# Altium PCB Featured_Tag_RBS020902T.PcbDoc
Units mm, origin at the board's own origin, x right, y up, seen from the top; angles counter-clockwise.
Board outline 33.22 x 33.22 mm, 2 copper layers (Top Layer, Bottom Layer); 37 components, 34 nets, 164 pads, 29 vias.
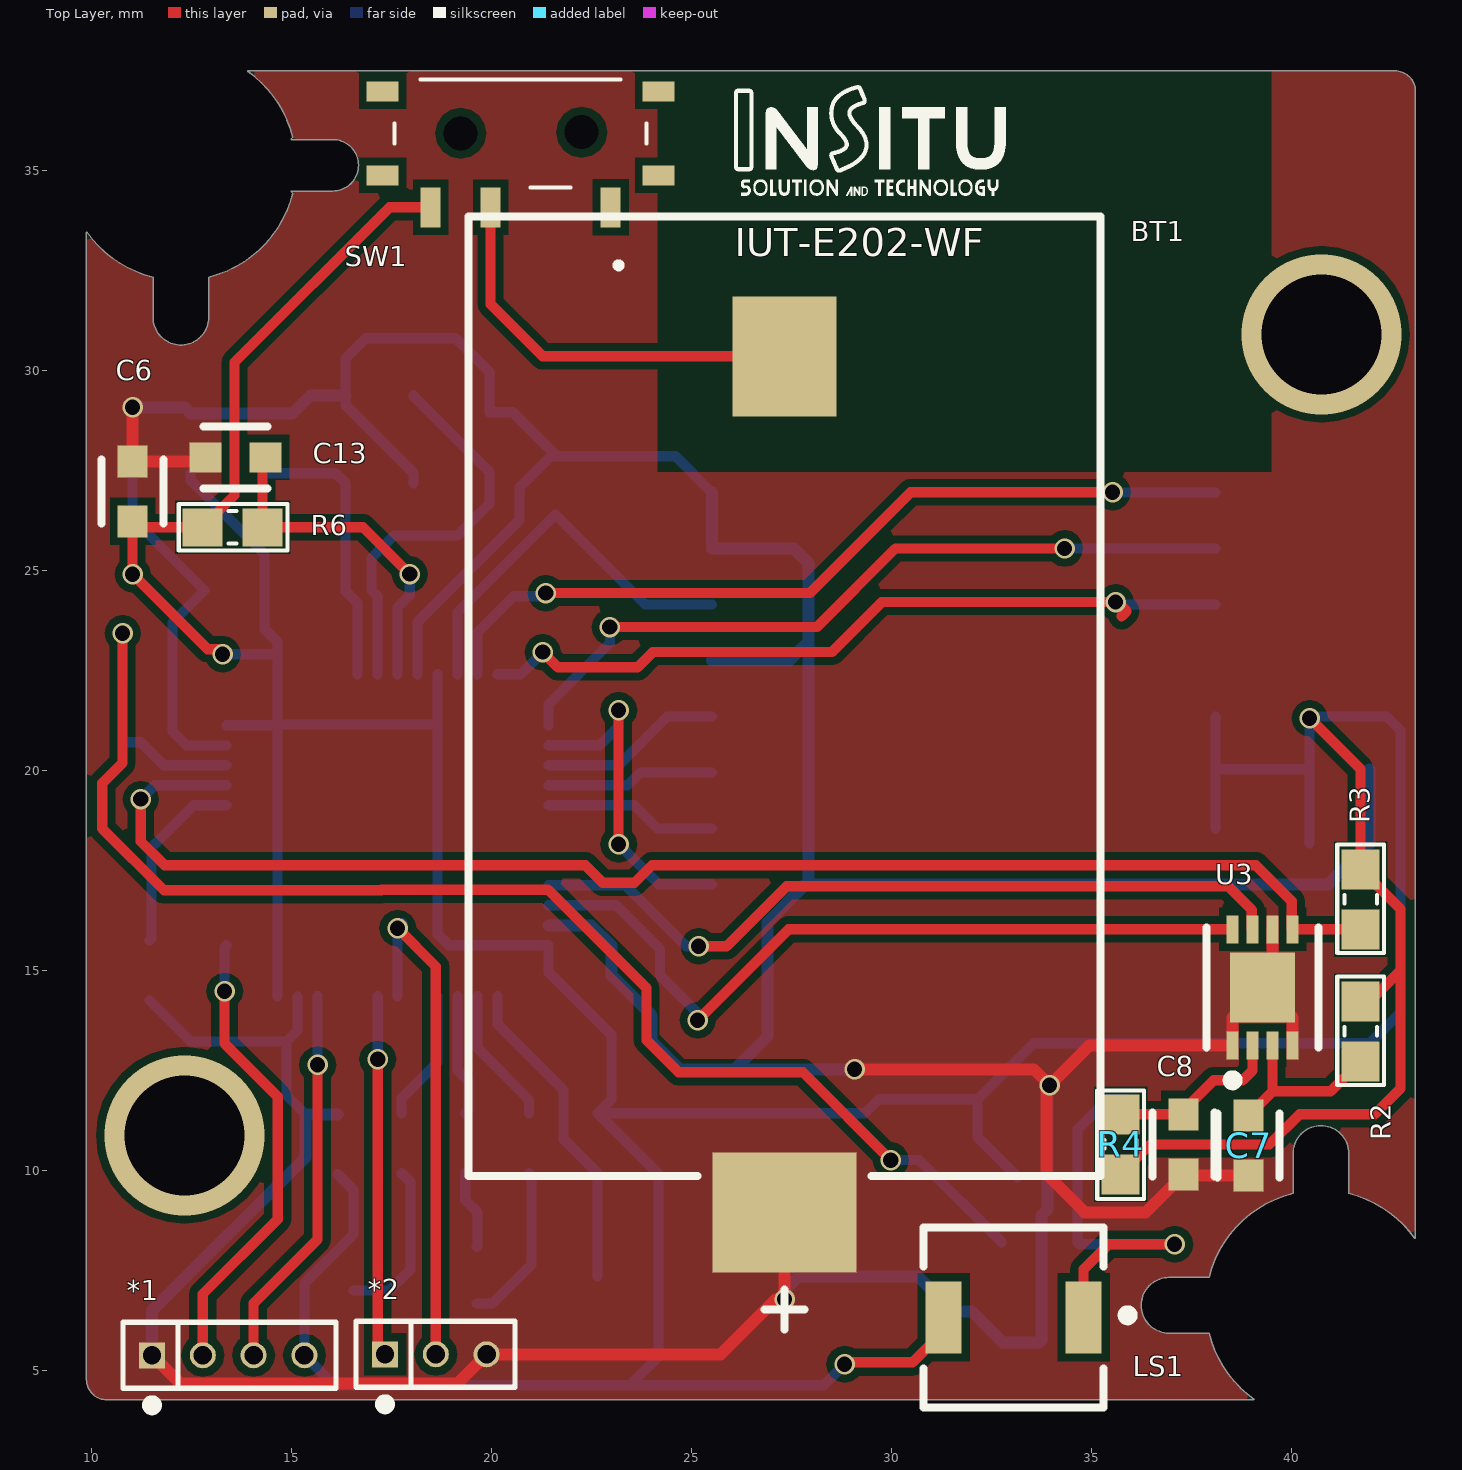
[diagram p0: Top Layer view]
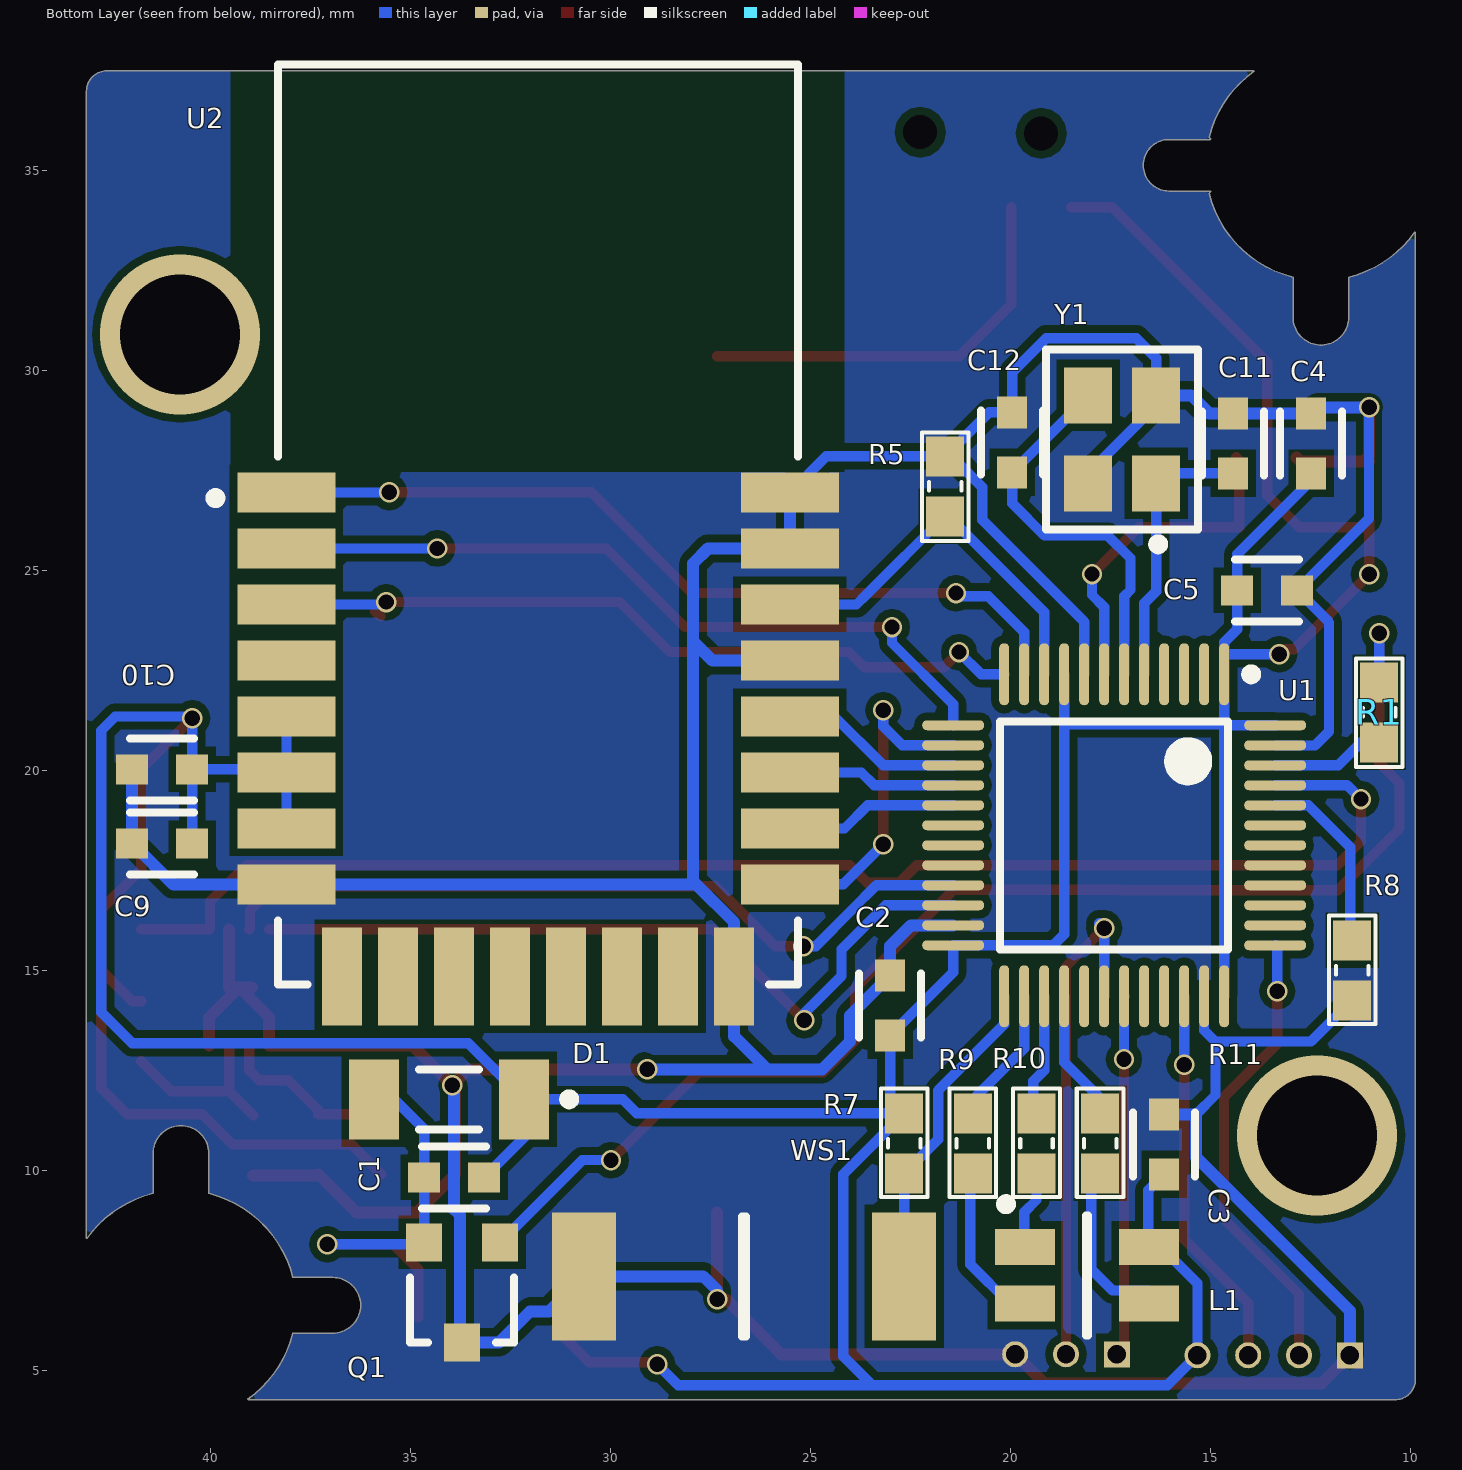
[diagram p1: Bottom Layer view, seen from below]
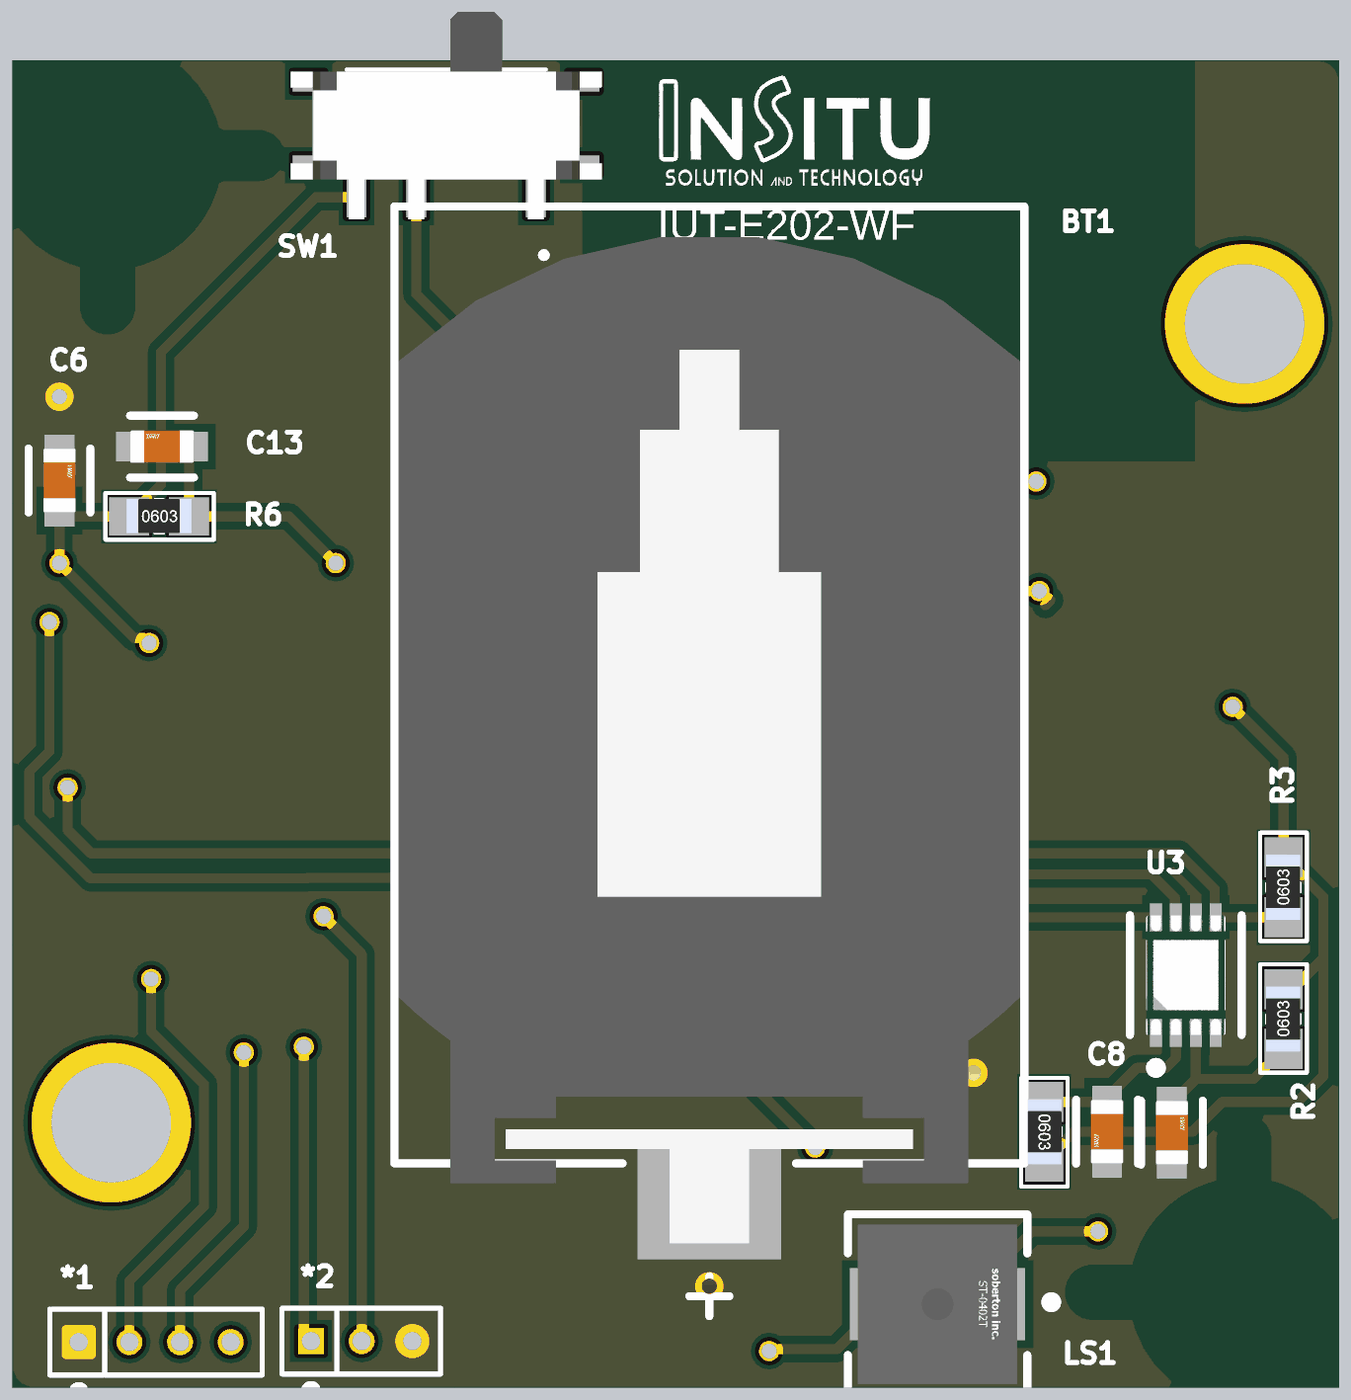
[diagram p2: 3D render of the assembled board from above, using the file's embedded part models]
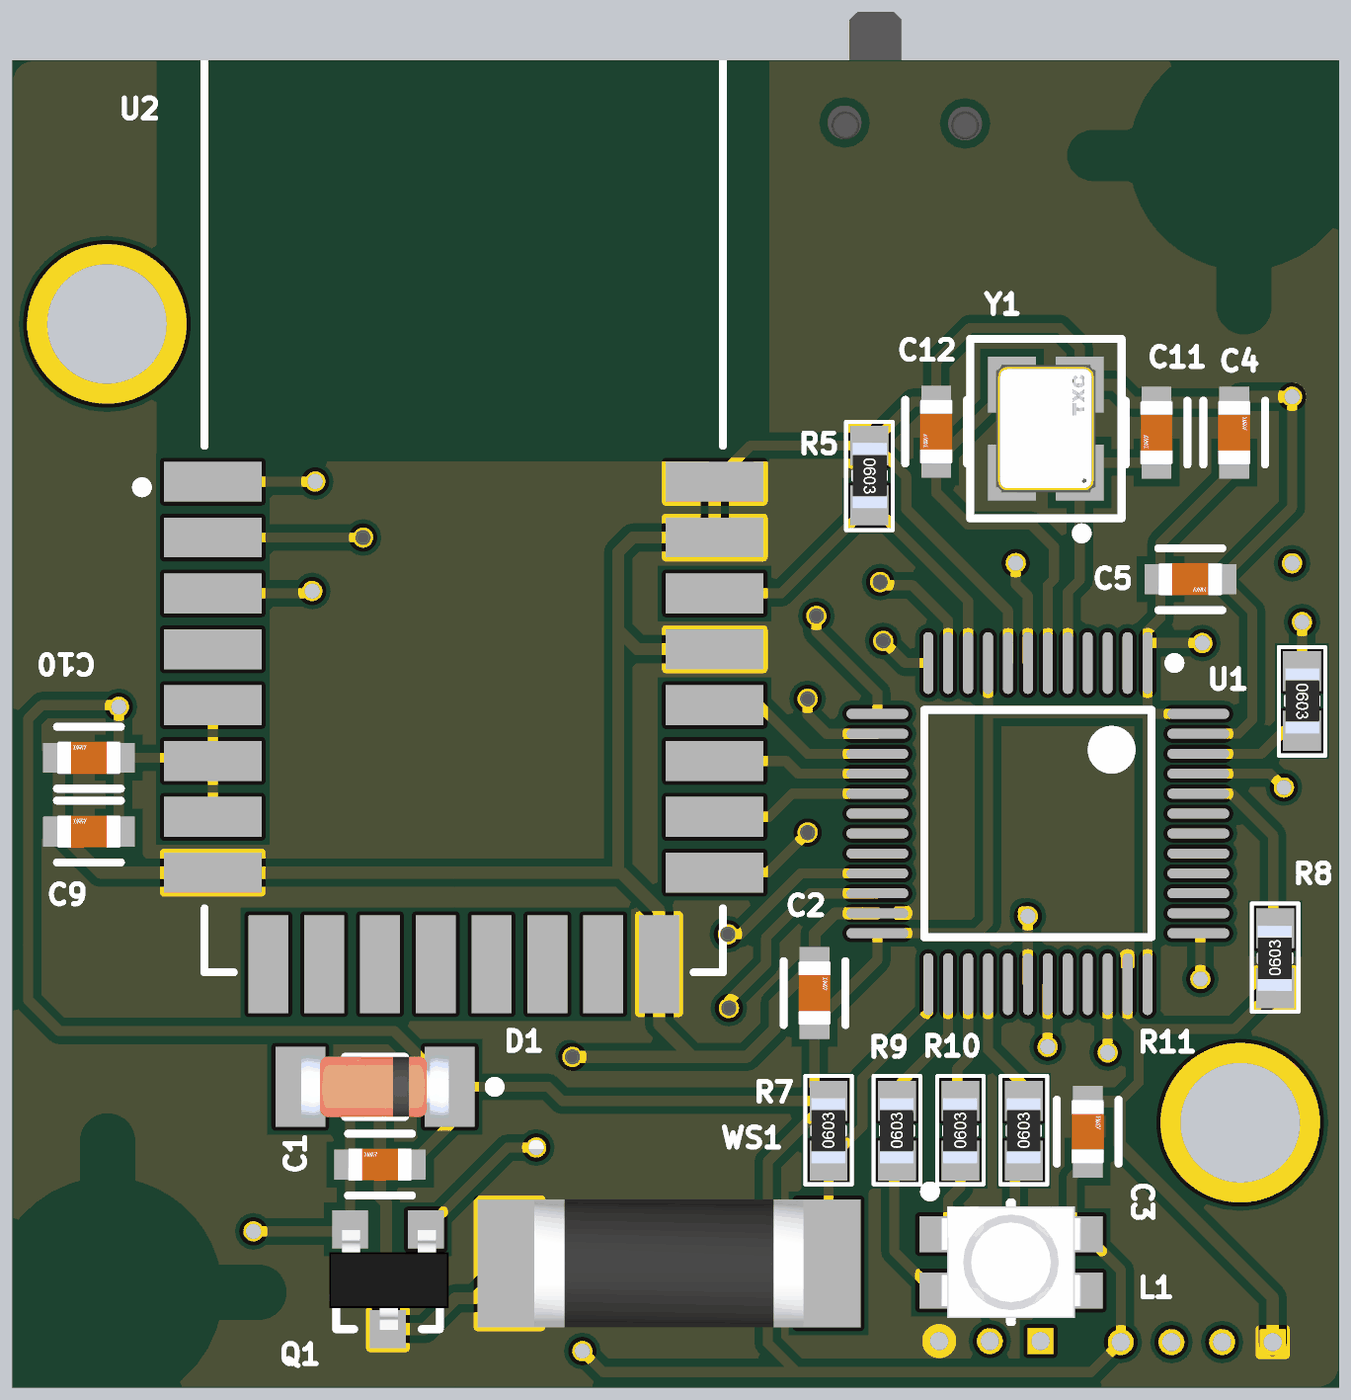
[diagram p3: 3D render of the assembled board from below, using the file's embedded part models]

## Layer stack, top to bottom
Top Solder: solder mask 0.0102, Solder Resist, Dk 3.5
Top Layer: signal copper 0.0356
Dielectric 1: dielectric 0.32, FR-4, Dk 4.8
Bottom Layer: signal copper 0.0356
Bottom Solder: solder mask 0.0102, Solder Resist, Dk 3.5

## Board outline
9.871,4.769 ccw(c10.377,4.769) 10.377,4.263 10.378,4.263 39.055,4.263 39.06,4.275 cw(c40.732,6.624) 37.936,5.923 37.929,5.928 36.935,5.928 36.934,5.928 cw(c36.935,6.624) 36.935,7.319 37.929,7.319 37.936,7.325 cw(c40.732,6.624) 40.031,9.42 40.037,9.427 40.037,10.421 40.037,10.422 cw(c40.732,10.421) 41.428,10.421 41.428,9.427 41.433,9.42 cw(c40.732,6.624) 43.081,8.296 43.093,8.299 43.093,36.978 43.093,36.979 ccw(c42.587,36.979) 42.587,37.485 13.908,37.485 13.904,37.472 cw(c12.232,35.124) 15.028,35.828 cw(c7.741,41.518) 14.989,35.778 14.994,35.767 16.03,35.767 cw(c16.03,35.124) 16.673,35.124 cw(c16.03,35.124) 16.03,34.48 14.994,34.48 14.989,34.47 cw(c7.719,28.712) 15.028,34.42 cw(c12.232,35.124) 12.933,32.327 12.928,32.321 12.928,31.326 cw(c12.232,31.326) 11.537,31.326 11.537,32.321 11.531,32.327 cw(c12.232,35.124) 9.884,33.452 9.871,33.448

## Design rules (kind name [scope] priority, off if disabled: settings)
Clearance [All] p1: gap=0.2 ignorepadtopadclearanceinfootprint=FALSE
HoleSize [All] p1: absolutevalues=TRUE maxlimit=6 minlimit=0.102 maxpercent=80.000 minpercent=20.000
HoleToHoleClearance [Istext] p1: gap=0.254 allowstackedmicrovias=TRUE
MinimumSolderMaskSliver [TextHeight] p1: minsoldermaskwidth=0.254
PolygonConnect [All] p1: connectstyle=Direct reliefconductorwidth=0.254 reliefentries=4 polygonreliefangle="90 Angle" airgapwidth=0.254
RoutingVias [All] p1: holewidth=0.46 width=0.46 viastyle="Through Hole" minholewidth=0.46 minwidth=0.46 maxholewidth=0.46 maxwidth=0.46
SilkToSilkClearance [TextHeight] p1: silktosilkclearance=0.254
SilkToSolderMaskClearance [IsText] p1: minsilkscreentomaskgap=0.15 clearancetoexposedcopper=TRUE
SolderMaskExpansion [All] p1: expansion=0.102 istentingtop=FALSE
Width [All] p1: maxlimit=0.9 minlimit=0.2 preferedwidth=0.6
25 further rules are at their usual default settings.

## Components (designator, comment, footprint, x,y, rotation, side; value= is the part's Value field where it differs from the comment)
*1 "JP 1x7 1.27mm" "JP 1x4 1.27mm" 11.485,5.375 r0 top
*2 "JP 1x3 1.27mm" "JP 1x3 1.27mm" 17.335,5.4 r0 top
BT1 "CR2032" FP-S8421-45R-MFG 27.325,21.85 r0 top
C1 "100pF" FP-0603-L_1_6_0_15-W_0_81-MFG 33.9,9.825 r0 bottom
C2 "100nF" FP-0603-L_1_6_0_15-W_0_81-MFG 23,14.125 r90 bottom
C3 "100nF" FP-0603-L_1_6_0_15-W_0_81-MFG 16.15,10.65 r90 bottom
C4 "100nF" FP-0603-L_1_6_0_15-W_0_81-MFG 12.475,28.175 r90 bottom
C5 "100nF" FP-0603-L_1_6_0_15-W_0_81-MFG 13.575,24.5 r180 bottom
C6 "4.7uF" FP-0603-L_1_6_0_15-W_0_81-MFG 11.025,26.975 r90 top
C7 "1uF" FP-0603-L_1_6_0_15-W_0_81-MFG 38.925,10.625 r90 top
C8 "10nF" FP-0603-L_1_6_0_15-W_0_81-MFG 37.3,10.65 r270 top
C9 "10uF" FP-0603-L_1_6_0_15-W_0_81-MFG 41.2,18.175 r0 bottom
C10 "100nF" FP-0603-L_1_6_0_15-W_0_81-MFG 41.2,20.025 r0 bottom
C11 "12pF" FP-0603-L_1_6_0_15-W_0_81-MFG 14.425,28.175 r270 bottom
C12 "12pF" FP-0603-L_1_6_0_15-W_0_81-MFG 19.95,28.2 r270 bottom
C13 "100nF" FP-0603-L_1_6_0_15-W_0_81-MFG 13.597,27.825 r180 top
D1 "LL4148" SOD-80 34.025,11.775 r0 bottom
L1 "LED 3528" "LED RGB 3528" 18.075,7.375 r180 bottom
LS1 "ST-0402-BUZZER" FP-ST-0402T-MFG 33.05,6.325 r180 top value=17Ω
Q1 "HF" SOT23 33.7,6.95 r0 bottom value=C9014
R1 "4.7" "tro smd 0603" 10.775,21.45 r270 bottom
R2 "1k" "tro smd 0603" 41.725,13.475 r90 top
R3 "4.7K" "tro smd 0603" 41.725,16.775 r90 top
R4 "1k" "tro smd 0603" 35.725,10.65 r270 top
R5 "10k" "tro smd 0603" 21.625,27.1 r270 bottom
R6 "10k" "tro smd 0603" 13.525,26.075 r0 top
R7 "10k" "tro smd 0603" 22.65,10.675 r90 bottom
R8 "10k" "tro smd 0603" 11.45,15 r90 bottom
R9 "1K" "tro smd 0603" 20.934,10.675 r90 bottom
R10 "1K" "tro smd 0603" 19.343,10.675 r90 bottom
R11 "1K" "tro smd 0603" 17.751,10.675 r90 bottom
SW1 "MSK-12C02" sw_msk_12c02 25.627,38.262 r180 top
U1 "STM32F103C8T6" STM-LQFP48_L 17.4,18.375 r270 bottom
U2 "DWM1000" DECW-DWM1000-24_V 31.8,26.145 r180 bottom
U3 "MAX17043G+T" FP-T823-1-MFG 39.275,14.575 r90 top
WS1 "RBS020902T" RBS020902T 26.65,7.35 r0 bottom
Y1 "8MHz" FP-7M-MFG 17.2,28.275 r90 bottom

## Footprints (in the part's own frame and the unit in brackets; to place one, negate y for a bottom-side part, rotate by r counter-clockwise, add the part's x,y. Pads: shape width x height; smd on the part's side, far side on the other; paste and mask are expansions set on the pad)
DECW-DWM1000-24_V [mm] "SMD, 24-Leads, Body 23x13mm, Pitch 1.4mm"
  rect 2.45x1 smd: 1(-6.295,0.8) 2(-6.295,-0.6) 3(-6.295,-2) 4(-6.295,-3.4) 5(-6.295,-4.8) 6(-6.295,-6.2) 7(-6.295,-7.6) 8(-6.295,-9) 17(6.295,-9) 18(6.295,-7.6) 19(6.295,-6.2) 20(6.295,-4.8) 21(6.295,-3.4) 22(6.295,-2) 23(6.295,-0.6) 24(6.295,0.8)
  rect 1x2.45 smd: 9(-4.9,-11.295) 10(-3.5,-11.295) 11(-2.1,-11.295) 12(-0.7,-11.295) 13(0.7,-11.295) 14(2.1,-11.295) 15(3.5,-11.295) 16(4.9,-11.295)
  silkscreen extent -8.2,-11.5 6.5,11.5, body extent -6.5,-11.5 6.5,11.5, height 4
FP-7M-MFG [mm]
  rect 1.4x1.2 smd paste+0 mask+0: 1(-1.1,-0.85) 2(1.1,-0.85) 3(1.1,0.85) 4(-1.1,0.85)
  silkscreen extent -2.75,-1.9 2.25,1.9, body extent -1.6,-1.25 1.6,1.25, height 0.8
FP-0603-L_1_6_0_15-W_0_81-MFG [mm]
  rect 0.8x0.75 smd paste+0 mask+0: 1(-0.75,0) 2(0.75,0)
  silkscreen extent -0.8,-0.77 0.8,0.77, body extent -0.8,-0.4 0.8,0.41, height 0.9
FP-S8421-45R-MFG [mm]
  rect 2.6x3 smd paste+0 mask+0: 1(0,8.5)
  rect 3.6x3 smd paste+0 mask+0: 2(0,-12.9)
  silkscreen extent -7.9,-15.83 7.9,12, body extent -8,-14.5 8,12.09, height 0.25
FP-ST-0402T-MFG [mm]
  rect 0.9x1.8 smd paste+0 mask+0: 1(-1.75,0) 2(1.75,0)
  silkscreen extent -2.98,-2.25 2.25,2.25, body extent -2.35,-2.35 2.35,2.35, height 0.25
FP-T823-1-MFG [mm]
  rect 0.7x0.3 smd paste+0 mask+0: 1(-1.45,0.75) 2(-1.45,0.25) 3(-1.45,-0.25) 4(-1.45,-0.75) 5(1.45,-0.75) 6(1.45,-0.25) 7(1.45,0.25) 8(1.45,0.75)
  rect 1.75x1.63 smd paste+0 mask+0: 9(0,0)
  silkscreen extent -2.45,-1.4 1.5,1.4, body extent -1.9,-1.12 1.9,1.12, height 0.25
"JP 1x3 1.27mm" [mm]
  rect 0.65x0.65 hole 0.46: 1(0,0)
  round 0.65 hole 0.46: 2(1.27,0) 3(2.54,0)
  silkscreen extent -0.73,-1.37 3.25,0.82
"JP 1x4 1.27mm" [mm]
  rect 0.65x0.65 hole 0.46: 1(0.025,0)
  round 0.65 hole 0.46: 2(1.295,0) 2(3.835,0) 3(2.565,0)
  silkscreen extent -0.7,-1.37 4.62,0.82
"LED RGB 3528" [mm] "Chip LED, 4-Leads, Body 2.8x3.5mm (max), Pitch 1.42mm, IPC Medium Density"
  rect 1.5x0.9 smd: 1(1.55,0.707) 2(1.55,-0.71) 3(-1.55,0.707) 4(-1.55,-0.707)
  silkscreen extent -2.16,-1.5 0.03,1.9, body extent -1.75,-1.4 1.75,1.4, height 1.87
RBS020902T [mm] "SENSOR SWITCH, 2-Leads, Body 6.75x3.20mm, IPC Medium Density"
  rect 1.6x3.2 smd: 1(-4,0) 2(4,0)
  silkscreen extent -0.05,-1.5 0.05,1.5, body extent -3.37,-1.6 3.38,1.6, height 3.2
SOD-80 [mm]
  rect 1.25x2 smd: 1(-1.875,0) 2(1.875,0)
  silkscreen extent -3.12,-0.75 0.75,0.75, body extent -1.85,-0.78 1.85,0.78, height 1.6
SOT23 [mm] "SOT23"
  rect 0.9x0.95 smd: 1(-0.95,-1.25) 2(0,1.25)
  rect 0.9x0.95 smd mask+0: 3(0.95,-1.25)
  silkscreen extent -1.3,-0.38 1.3,1.25, body extent -1.52,-1.23 1.48,1.27, height 1.06
STM-LQFP48_L [mm] "QFP, 48-Leads, Body 7x7mm, Pitch 0.5mm, IPC High Density"
  oval 1.55x0.25 smd: 1(-4.025,2.75) 2(-4.025,2.25) 3(-4.025,1.75) 4(-4.025,1.25) 5(-4.025,0.75) 6(-4.025,0.25) 7(-4.025,-0.25) 8(-4.025,-0.75) 9(-4.025,-1.25) 10(-4.025,-1.75) 11(-4.025,-2.25) 12(-4.025,-2.75) 25(4.025,-2.75) 26(4.025,-2.25) 27(4.025,-1.75) 28(4.025,-1.25) 29(4.025,-0.75) 30(4.025,-0.25) 31(4.025,0.25) 32(4.025,0.75) 33(4.025,1.25) 34(4.025,1.75) 35(4.025,2.25) 36(4.025,2.75)
  oval 0.25x1.55 smd: 13(-2.75,-4.025) 14(-2.25,-4.025) 15(-1.75,-4.025) 16(-1.25,-4.025) 17(-0.75,-4.025) 18(-0.25,-4.025) 19(0.25,-4.025) 20(0.75,-4.025) 21(1.25,-4.025) 22(1.75,-4.025) 23(2.25,-4.025) 24(2.75,-4.025) 37(2.75,4.025) 38(2.25,4.025) 39(1.75,4.025) 40(1.25,4.025) 41(0.75,4.025) 42(0.25,4.025) 43(-0.25,4.025) 44(-0.75,4.025) 45(-1.25,4.025) 46(-1.75,4.025) 47(-2.25,4.025) 48(-2.75,4.025)
  silkscreen extent -4.15,-2.85 2.85,3.55, body extent -3.5,-3.5 3.5,3.5, height 1.6
sw_msk_12c02 [mm]
  rect 0.5x1 smd: A1(2.652,4.187) B1(5.652,4.187) C1(7.152,4.187)
  round 0.425 hole 0.85 unplated: MH1(3.378,2.311) MH2(6.402,2.337)
  rect 0.8x0.5 smd: MP1(8.352,3.387) MP2(8.352,1.287) MP3(1.452,1.287) MP4(1.452,3.387)
  silkscreen extent 1.75,0.99 8.05,5.69, body extent 1,-0.46 8.8,4.74, height 1.46
"tro smd 0603" [mm] "Chip Capacitor, 2-Leads, Body 1,60x0,80mm, IPC Medium Density"
  rect 1x0.95 smd mask+0.076: 1(-0.75,0) 2(0.75,0)
  silkscreen extent -1.35,-0.58 1.37,0.58, body extent -0.82,-0.42 0.82,0.43, height 0.44

## Part data
BT1: library part CR2450NFH-LF, "Battery", Manufacturer_Name=RENATA, Mouser Part Number=614-CR2450NFH-LF, Datasheet Link=https://www.renata.com/fileadmin/downloads/productsheets/lithium/tabbed_lithium/tab_2pins_horizontal/CR2450NFH-LF.pdf, Height=5mm, Manufacturer_Part_Number=CR2450NFH-LF, Mouser Price/Stock=https://www.mouser.co.uk/ProductDetail/Renata/CR2450NFH-LF/?qs=xQKTP3rDTQhL%252B2W8VgWSZA%3D%3D
C1 C2 C3 C4 C5 C6 C7 C8 C9 C10 C11 C12 C13: library part CMP-2006-04515-2, "General Purpose Ceramic Capacitor, 0603, 33nF, 5%, X7R, 15%, 16V", Capacitance=33nF, Case/Package=0603, Case Code (Metric)=1608, Dielectric=X7R, Max Operating Temperature=125°C, Min Operating Temperature=-55°C, Package Quantity=4000, Tolerance=5%, Voltage Rating=16V, Case Code (Imperial)=0603, Construction=Flat, Depth=0.81mm, Dissipation Factor=3.5%, Length=1.6mm, Mount="Surface Mount", Number of Pins=2, Packaging="Tape and Reel", Radiation Hardening=No, RoHS Compliant=Yes, Series=-, Termination=SMD/SMT, Thickness=0.035inch, Voltage Rating (DC)=16V, Width=0.032inch
D1: library part LL4148-GS18, "Vishay LL4148-GS18 Switching Diode, 300mA, 2-Pin MiniMELF", Manufacturer_Name=Vishay, Mouser Part Number=78-LL4148-GS18, Arrow Part Number=LL4148-GS18, Arrow Price/Stock=https://www.arrow.com/en/products/ll4148-gs18/vishay?region=nac, Datasheet Link=https://www.vishay.com/docs/85557/ll4148.pdf, Manufacturer_Part_Number=LL4148-GS18, Mouser Price/Stock=https://www.mouser.co.uk/ProductDetail/Vishay-Semiconductors/LL4148-GS18?qs=YkIJFe%252BtFEUsKqcD4T1jvg%3D%3D
L1: library part "LED 3528 RGB", "Dán", Chung_Loai=Dán, Don_Vi=Con, Ma_Hang=MH007160, Ten_Linh_Kien="LED3528 RGB"
LS1: library part CMP-247804-000001-1, "AUDIO MAGNETIC XDCR 2-4V SMD", Current=90mA, Frequency=4kHz, Manufacturer="Soberton Inc.", Manufacturer Part Number=ST-0402T, Max Supply Voltage=4V, Min Supply Voltage=2V, Operating Supply Voltage=3V, Resistance=17Ω, Temperature="-30°C to +70°C", Temperature Range High=+70°C, Temperature Range Low=-30°C, Automotive=No, Category=Speak, ComponentLink2Description=Datasheet, ComponentLink2URL=https://www.soberton.com/wp-content/uploads/2019/02/ST-0402T-19-Feb-2019.pdf, Device Class L1=Electromechanical, Device Class L2="Audio Products", Device Class L3=Buzzers, Digikey Description="AUDIO MAGNETIC XDCR 2-4V SMD", Height=2.5mm, Lead Free=Yes, Octopart=https://octopart.com/st-0402t-soberton-60771822, Package=ST-0402T, RoHS=TRUE
Q1: library part "C1815 HF SMD", "NPN transistor"
R1 R2 R3 R4: library part "Tro 0603 5% 1k", "Dán", Chung_Loai=Dán, Don_Vi=Con, Ma_Hang=MH006319, So_Chan=2, Ten_Linh_Kien="Trở 0603 5% 1k"
R5 R6 R7 R8: library part "Tro 0603 5% 10k", "Dán", Chung_Loai=Dán, Don_Vi=Con, Ma_Hang=MH006316, So_Chan=2, Ten_Linh_Kien="Trở 0603 5% 10k"
R9 R11: library part "Tro 0603 5% 100R", "Dán", Chung_Loai=Dán, Don_Vi=Con, Ma_Hang=MH006315, So_Chan=2, Ten_Linh_Kien="Trở 0603 5% 100R"
R10: library part "Tro 0603 5% 150R", "Dán", Chung_Loai=Dán, Don_Vi=Con, Ma_Hang=MH006318, So_Chan=2, Ten_Linh_Kien="Trở 0603 5% 150R"
U1: library part CMP-0237-00215-3, "ARM Cortex-M3 32-bit MCU, 64 KB Flash, 20 KB Internal RAM, 37 I/Os, 48-pin LQFP, -40 to 85 degC, Tray", I/Os (High Current)=37, Operating Frequency(F) (Processor speed) (MHz)=72, Supply Voltage(Vcc) min (V)=2, A/D Converter="2x12-bit (10 Channel)", ComponentLink1Description="Manufacturer URL", ComponentLink1URL=http://www.st.com/web/en/home.html, ComponentLink2Description=Datasheet, ComponentLink2URL=http://www.st.com/st-web-ui/static/active/en/resource/technical/document/datasheet/CD00161566.pdf, ComponentLink3Description="Package Specification", ComponentLink3URL=http://www.st.com/st-web-ui/static/active/en/resource/technical/document/datasheet/DM00058181.pdf, ComponentLink4Description="New link", ComponentLink4URL=https://www.mouser.vn/ProductDetail/STMicroelectronics/STM32F103C8T6?qs=bhCVus9SdFtq6kqxsU5%2FDA%3D%3D, ComponentLink5Description="New link", ComponentLink5URL=7.63$, Core="ARM Cortex-M3", DatasheetVersion="Rev. 16", FLASH Size (Prog) (kB)=64, Internal RAM Size (kB)=20, Mounting Technology="Surface Mount", PackageDescription="48-Pin Low Profile Quad Flat Package, 7 x 7 mm Body, 0.5 mm Pitch", PackageReference=LQFP48, PackageVersion="Rev. 6, 06/2013", Packing=Tray, PartNumber=STM32F103C8T6
U2: library part CMP-2000-05094-1, "DW M1000 IEEE 802.15.4 -2011 UWB Transceiver Module", Current - Receiving=64mA, Current - Transmitting=31mA, Frequency=3.5GHz~6.5GHz, Manufacturer=Decawave, Operating Temperature=-40degC~85degC, Package / Case=Module, Power - Output=-, Standard Package=500, Voltage - Supply=2.8V~3.6V, Antenna Type=Integrated,Chip, Category=RF/IFandRFID, ComponentLink1Description="New link", ComponentLink1URL=https://www.mouser.vn/ProductDetail/Qorvo/DWM1000?qs=sGAEpiMZZMu3sxpa5v1qrrjDD2pjKdCcRPXEFIZh8rA%3D, ComponentLink2Description="New link", ComponentLink2URL=16.67$, Data Rate=6.8Mbps, Datasheet URL=http://www.decawave.com/sites/default/files/resources/dwm1000-datasheet-v1.3.pdf, Datasheet Version="Rev. V1.0, 12/2015", Design Resources=DevelopmentToolSelector, Family=RFTransceiverModules, Featured Product=ScenSorDWM1000Module, Manufacturer URL=http://www.decawave.com/, Memory Size=-, Modulation=BPM,BPSK, Mounting Type=SurfaceMount, Online Catalog=ScenSorDWM1000Module, Other Names=1479-1002-2RUPF-G001A, Packaging=Tape&Reel(TR), Protocol=IR-UWB, RF Family/Standard=802.15.4, Sensitivity=-, Serial Interfaces=SPI, Series=-
U3: library part CMP-05715-000066-1, "IC 2-WIRE FG MODEL GAUGE LO BATT", Manufacturer=Maxim, Max Supply Voltage=4.5V, Min Supply Voltage=2.5V, Nominal Supply Current=50uA, Package=T823-1, Temperature="-20°C to +70°C", Temperature Range High=+70°C, Temperature Range Low=-20°C, Automotive=No, Category=IC, ComponentLink2Description=Datasheet, ComponentLink2URL=https://datasheets.maximintegrated.com/en/ds/MAX17043-MAX17044.pdf, Device Class L1="Integrated Circuits (ICs)", Device Class L2="Power Management ICs", Device Class L3="Battery Management", Digikey Description="IC 2-WIRE FG MODEL GAUGE LO BATT", Footprint Url=https://pdfserv.maximintegrated.com/land_patterns/90-0091.PDF, Height=0.8mm, Lead Free=Yes, Manufacturer Part Number=MAX17043G+T, Mouser Description="Battery Management Over Volt Protector Ideal Diode", Number Of Cells=1, Octopart=https://octopart.com/max17043g%2Bt-maxim+integrated-43979038, RoHS=TRUE, Standoff Height=0mm
Y1: library part CMP-18717-000290-1, "Crystal 26MHz, 30ppm, 18pF, 50Ω", Case/Package=SMD/SMT, ESR (Equivalent Series Resistance)=60R, Frequency=26MHz, Frequency Stability=30ppm, Load Capacitance=18pF, Max Operating Temperature=70°C, Min Operating Temperature=-20°C, Package Quantity=3000, Depth=2.5mm, Frequency Tolerance=30ppm, Height=0.031inch, Length=3.2mm, Mount="Surface Mount", Number of Pins=4, Packaging="Tape and Reel", REACH SVHC="No SVHC", Series=7M, Termination=SMD/SMT, Tolerance=30ppm, Width=0.098inch

## Via types
v1: diameter 0.508, hole 0.381, Top Layer to Bottom Layer, 27 vias
v2: diameter 4, hole 3, Top Layer to Bottom Layer, 2 vias

## Nets (pads, with @x,y where several pads share a name; then routed paths per layer and width w, separated by ;. In a path a pad name is that pad's centre, name@x,y a point inside that pad or via, vN(x,y) a via of type N, cw(c..) or ccw(c..) an arc to the next point about the centre after c; other vN are vias at no path point)
+3: *1.2@15.32,5.375 C1.1 C2.1 C3.1 C4.1 C5.1 C6.1 C9.1 C10.1 D1.1 L1.1 LS1.2 R2.2 R3.2 R4.2 R6.1 R7.2 SW1.C1 U1.1 U1.9 U1.24 U1.36 U1.48 U2.5 U2.6 U2.7 | length 143.1
  Top Layer w0.254: v1@13.325,22.9 v1(13.275,22.9) 13.15,23.025 12.9,23.025 v1(11.025,24.9) C6.1 11.175,26.075 R6.1 13.574,26.874 13.574,30.199 17.45,34.075 SW1.C1 ; v1(28.825,5.15) 28.875,5.2 30.525,5.2 31.3,5.975 LS1.2 ; R4.2 36.473,10.648 39.448,10.648 40.2,11.4 42.075,11.4 42.725,12.05 42.725,15 ; v1(40.45,21.3) 41.725,20.025 R3.2 42.725,16.525 42.725,15 ; R2.2 41.95,14.225 42.725,15
  Bottom Layer w0.254: C4.1 12.475,27.25 14.325,25.4 C5.1 14.325,23.525 14.65,23.2 U1.1@14.65,22.875 ; v1(13.275,22.9) 14.625,22.9 U1.1@14.65,22.875 ; U1.48 14.65,21.125 ; U1.36 14.65,21.125 ; C3.1 16.55,9.5 16.55,8.408 15.32,7.178 15.32,5.375 16.07,4.625 23.45,4.625 ; U1.9 18.65,21.145 ; v1(28.825,5.15) 28.3,4.625 23.45,4.625 ; C1.1 32.15,10.825 D1.1 ; U2.7 U2.6 ; U2.5 U2.6 ; C9.1 C10.1 ; 14.65,21.125 14.65,21.145 ; 14.65,21.145 U1.1 U1.1@14.65,22.875 ; 14.65,21.145 18.65,21.145 ; 18.65,21.145 18.65,15.9 18.925,15.625 U1.24 21.425,14.95 C2.1 23,11.775 R7.2 ; R7.2 29.335,11.425 29.685,11.775 D1.1 ; R7.2 24.175,9.9 24.175,5.35 23.45,4.625 ; D1.1 33.55,13.175 41.95,13.175 42.725,13.95 42.725,20.995 42.375,21.345 40.495,21.345 v1(40.45,21.3) C10.1 ; U2.6 38.175,20.025 C10.1
BLUE: R11.2 U1.28 | length 3.3
  Bottom Layer w0.254: R11.2 17.751,11.801 18.65,12.7 U1.28
BOOT0: R8.2 U1.44 | length 4.7
  Bottom Layer w0.254: R8.2 11.5,15.8 11.5,18.075 12.55,19.125 U1.44
BUZZER: R1.2 U1.46 | length 2.8
  Bottom Layer w0.254: R1.2 11.225,20.7 11.8,20.125 U1.46
CLK: *1.2@12.78,5.375 U1.37 | length 11.6
  Top Layer w0.254: *1.2@12.78,5.375 12.78,6.905 14.652,8.777 14.652,11.839 13.325,13.166 v1(13.325,14.475)
  Bottom Layer w0.254: v1(13.325,14.475) 13.325,15.575 U1.37
DIO: *1.3 U1.34 | length 9.6
  Top Layer w0.254: *1.3 14.05,6.675 15.65,8.275 v1(15.65,12.635)
  Bottom Layer w0.254: v1@15.65,12.635 U1.34
GND: *1.1 *2.3 BT1.2 C2.2 C3.2 C4.2 C5.2 C6.2 C7.1 C8.2 C9.2 C10.2 C11.1 C12.1 C13.2 Q1.2 R5.1 R8.1 U1.8 U1.23 U1.35 U1.47 U2.8 U2.16 U2.21 U2.23 U2.24 U3.1 U3.4 U3.6 U3.9 WS1.2 Y1.2 Y1.4 | length 160.6
  Top Layer w0.3: v1(11.025,29.075) 11.025,27.875 11.1,27.8 C6.2 12.747,27.725 C13.2 ; *1.1 12.21,4.675 19.15,4.675 *2.3 25.725,5.4 27.1,6.775 v1(27.325,6.775) BT1.2 ; v1(29.075,12.525) 33.55,12.525 v1(33.95,12.125) ; C7.1 37.325,9.875 C8.2 36.35,8.95 34.825,8.95 33.875,9.9 33.875,12.05 v1(33.95,12.125) ; U3.9@38.95,14.575 U3.9 ; U3.6 39.525,14.575 U3.9 ; U3.4 40.025,13.825 U3.9 ; v1(33.95,12.125) 34.95,13.125 U3.1 38.525,13.825 U3.9
  Bottom Layer w0.25: v1(11.025,29.075) 11.025,26.3 C5.2 12.025,23.7 12.025,20.975 12.375,20.625 U1.47 ; R8.1 12.475,13.225 14.868,13.225 ; U1.35 15.15,13.493 14.875,13.218 14.868,13.225 ; 15.35,11.4 14.868,11.882 14.868,13.225
  Bottom Layer w0.254: Y1.4 18.05,27.425 16.35,29.125 Y1.2 16.35,30.3 16.85,30.8 19.1,30.8 19.95,29.95 C12.1 20.525,28.95 R5.1 ; U1.8 18.15,23.709 20.7,26.259 20.7,27.075 21.475,27.85 R5.1 ; U2.24 24.6,27.85 R5.1
  Bottom Layer w0.3: v1(11.025,29.075) 12.325,29.075 C4.2 C11.1 15.025,28.925 15.475,29.375 Y1.2 ; *1.1 11.51,6.485 15.35,10.325 15.35,11.4 C3.2 ; U1.23 22.481,16.125 23,15.606 C2.2 24,13.875 24,13.225 24.7,12.525 26.075,12.525 ; U2.21 27.445,22.745 27.925,23.225 ; U2.24 U2.23 27.555,25.545 27.925,25.175 27.925,23.225 ; v1(27.325,6.775) 27.325,7 27.675,7.35 WS1.2 31.525,6.475 32,6.475 32.775,5.7 Q1.2 33.75,5.75 33.75,8.875 33.9,9.025 33.9,12.075 v1(33.95,12.125) ; v1@29.15,12.6 v1(29.075,12.525) 26.075,12.525 ; C10.2 C9.2 40.92,17.145 U2.8 28,17.145 ; 26.075,12.525 26.9,13.35 U2.16 26.9,16.2 27.845,17.145 28,17.145 ; 27.925,23.225 27.925,17.22 28,17.145
GREEN: R9.2 U1.26 | length 3.5
  Bottom Layer w0.254: U1.26 19.65,13.05 20.934,11.766 R9.2
INTERRUPT_PIN: R3.1 U1.45 U3.5 | length 35.5
  Top Layer w0.254: v1(11.23,19.278) 11.23,18.22 11.825,17.625 22.34,17.625 22.777,17.188 23.573,17.188 24.01,17.625 39.105,17.625 40.002,16.728 40.002,16.048 U3.5 R3.1
  Bottom Layer w0.254: v1(11.23,19.278) 11.577,19.625 U1.45
NetBT1_1: BT1.1 SW1.B1 | length 10.3
  Top Layer w0.254: SW1.B1 19.975,31.65 21.275,30.35 BT1.1
NetC1_2: C1.2 D1.2 LS1.1 Q1.3 | length 10.6
  Top Layer w0.254: LS1.1 34.8,7.525 35.425,8.15 v1(37.075,8.15)
  Bottom Layer w0.254: D1.2 35.4,11.775 34.65,11.025 C1.2 Q1.3 34.7,8.15 v1(37.075,8.15)
NetC7_2: C7.2 R2.1 U3.3 | length 4.5
  Top Layer w0.254: C7.2 39.525,11.975 ; U3.3 39.525,11.975 ; R2.1 40.975,11.975 39.525,11.975
NetC8_1: C8.1 R4.1 U3.2 | length 4.4
  Top Layer w0.254: R4.1 C8.1 37.3,11.5 38.05,12.25 38.775,12.25 39.025,12.5 U3.2
NetL1_2: L1.2 R11.1 | length 4.1
  Bottom Layer w0.254: L1.2@16.55,6.99 17.44,6.99 17.975,7.525 17.975,9.701 R11.1
NetL1_3: L1.3 R10.1 | length 2
  Bottom Layer w0.254: R10.1 19.343,9.257 19.65,8.95 19.65,8.107 L1.3
NetL1_4: L1.4 R9.1 | length 4.1
  Bottom Layer w0.254: L1.4 20.018,6.667 21,7.65 21,9.859 R9.1
NetQ1_1: Q1.1 R1.1 | length 33.9
  Top Layer w0.254: v1(10.775,23.425) 10.775,20.184 10.268,19.677 10.268,18.54 11.808,17 17.24,17 17.252,17.012 21.413,17.012 23.875,14.55 23.875,13.25 24.675,12.45 27.784,12.45 v1(29.981,10.253)
  Bottom Layer w0.254: R1.1 v1(10.775,23.425) v1@10.775,23.45 ; v1@29.981,10.306 v1(29.981,10.253) 30.697,10.253 Q1.1
OSCIN: C11.2 U1.5 Y1.1 | length 6.9
  Bottom Layer w0.254: C11.2 16.1,27.425 Y1.1 16.35,24.475 16.65,24.175 U1.5
OSCOUT: C12.2 U1.6 Y1.3 | length 10
  Bottom Layer w0.254: U1.6 17.15,24.349 16.993,24.505 16.993,25.302 17.557,25.866 19.141,25.866 19.95,26.675 C12.2 18.05,29.35 Y1.3
RED: R10.2 U1.27 | length 3.1
  Bottom Layer w0.254: U1.27 19.15,12.5 19.425,12.225 19.425,11.508 R10.2
RESET: C13.1 R6.2 U1.7 | length 8.6
  Top Layer w0.254: C13.1 14.275,27.753 R6.2 16.784,26.075 v1(17.955,24.904)
  Bottom Layer w0.254: U1.7 17.65,24.075 17.955,24.38 v1(17.955,24.904)
RX: *2.1 U1.31 | length 9.1
  Top Layer w0.254: v1(17.155,12.778) 17.155,5.58 *2.1
  Bottom Layer w0.254: U1.31 17.155,14.345 v1(17.155,12.778) v1@17.155,12.655
SCL_MAX: U1.21 U3.7 | length 19.6
  Top Layer w0.254: v1(25.175,15.6) 25.875,15.6 27.375,17.1 38.412,17.1 39.002,16.51 39.002,16.048 U3.7
  Bottom Layer w0.254: U1.21 23.345,17.125 23.953,16.517 23.953,16.51 24.863,15.6 v1(25.175,15.6)
SDA_MAX: U1.22 U3.8 | length 19.7
  Top Layer w0.254: v1(25.15,13.75) 27.425,16.025 U3.8
  Bottom Layer w0.254: U1.22 23.112,16.625 24.213,15.524 24.213,14.862 25.15,13.925 v1(25.15,13.75)
SW_R: R7.1 U1.25 WS1.1 | length 8
  Bottom Layer w0.254: U1.25 20.15,13.646 21.8,11.996 21.8,10.775 R7.1 WS1.1
TX: *2.2 U1.30 | length 12.9
  Top Layer w0.254: v1(17.65,16.05) 18.605,15.095 *2.2
  Bottom Layer w0.254: U1.30 v1(17.65,16.05) v1@17.775,16.175
UWBCLK: U1.15 U2.20 | length 4.6
  Bottom Layer w0.254: U1.15 23.175,20.125 24.395,21.345 U2.20
UWBCS: U1.14 U2.17 | length 8.4
  Top Layer w0.254: v1(23.175,18.15) v1(23.175,21.5)
  Bottom Layer w0.254: U1.14 22.7,20.625 23.175,21.1 v1(23.175,21.5) ; v1(23.175,18.15) 24.175,17.15 25.5,17.15 U2.17
UWBEXT: U1.11 U2.1 | length 21.1
  Top Layer w0.254: v1(21.356,24.429) 27.954,24.429 30.475,26.95 v1(35.525,26.95) v1@35.55,26.925
  Bottom Layer w0.254: U1.11 19.65,23.45 20.55,24.35 21.318,24.35 21.396,24.429 v1(21.356,24.429) ; v1(35.525,26.95) 35.53,26.945 U2.1
UWBIRQ: R5.2 U1.10 U2.22 | length 9.8
  Bottom Layer w0.254: U1.10 19.15,23.95 21.588,26.388 21.593,26.393 21.63,26.355 23.598,24.387 23.84,24.145 U2.22
UWBMISO: U1.16 U2.19 | length 4.2
  Bottom Layer w0.254: U1.16 23.4,19.625 23.72,19.945 U2.19
UWBMOSI: U1.17 U2.18 | length 4.3
  Bottom Layer w0.254: U1.17 23.56,19.125 24.14,18.545 U2.18
UWBRST: U1.12 U2.3 | length 19.7
  Top Layer w0.254: v1@21.375,22.95 21.371,22.954 v1(21.279,22.954) 21.657,22.575 23.65,22.575 24.029,22.954 28.504,22.954 29.754,24.204 v1(35.6,24.204) 35.646,24.204 35.875,23.975 35.75,23.85
  Bottom Layer w0.254: U1.12 20.725,22.4 v1(21.279,22.954) ; v1(35.6,24.204) 35.659,24.145 U2.3
UWBWAKEUP: U1.13 U2.2 | length 19.1
  Top Layer w0.254: v1(22.956,23.579) 28.129,23.579 30.095,25.545 v1(34.325,25.545)
  Bottom Layer w0.254: U1.13 21.425,21.65 22.956,23.181 v1(22.956,23.579) 22.996,23.579 v1@22.975,23.6 ; v1(34.325,25.545) U2.2
pads on no net: SW1.A1 SW1.MH1 SW1.MH2 SW1.MP1 SW1.MP2 SW1.MP3 SW1.MP4 U1.2 U1.3 U1.4 U1.18 U1.19 U1.20 U1.29 U1.32 U1.33 U1.38 U1.39 U1.40 U1.41 U1.42 U1.43 U2.4 U2.9 U2.10 U2.11 U2.12 U2.13 U2.14 U2.15
copper on no net:
  other v2: 12.325,10.875 40.75,30.9

## Polygon pours and split planes (outlines as drawn)
GND on Top Layer "GND_L01_P000" (solid, pour order 0): 9.871,4.769 ccw(c10.377,4.769) 10.377,4.263 10.378,4.263 39.055,4.263 39.06,4.275 cw(c40.732,6.624) 37.936,5.923 37.929,5.928 36.935,5.928 36.934,5.928 cw(c36.935,6.624) 36.935,7.319 37.929,7.319 37.936,7.325 cw(c40.732,6.624) 40.031,9.42 40.037,9.427 40.037,10.421 40.037,10.422 cw(c40.732,10.421) 41.428,10.421 41.428,9.427 41.433,9.42 cw(c40.732,6.624) 43.081,8.296 43.093,8.299 43.093,36.978 43.093,36.979 ccw(c42.587,36.979) 42.587,37.485 13.908,37.485 13.904,37.472 cw(c12.232,35.124) 15.028,35.828 cw(c7.741,41.518) 14.989,35.778 14.994,35.767 16.03,35.767 cw(c16.03,35.124) 16.673,35.124 cw(c16.03,35.124) 16.03,34.48 14.994,34.48 14.989,34.47 cw(c7.719,28.712) 15.028,34.42 cw(c12.232,35.124) 12.933,32.327 12.928,32.321 12.928,31.326 cw(c12.232,31.326) 11.537,31.326 11.537,32.321 11.531,32.327 cw(c12.232,35.124) 9.884,33.452 9.871,33.448
GND on Bottom Layer "GND_L02_P001" (solid, pour order 1): 9.871,4.769 ccw(c10.377,4.769) 10.377,4.263 10.378,4.263 39.055,4.263 39.06,4.275 cw(c40.732,6.624) 37.936,5.923 37.929,5.928 36.935,5.928 36.934,5.928 cw(c36.935,6.624) 36.935,7.319 37.929,7.319 37.936,7.325 cw(c40.732,6.624) 40.031,9.42 40.037,9.427 40.037,10.421 40.037,10.422 cw(c40.732,10.421) 41.428,10.421 41.428,9.427 41.433,9.42 cw(c40.732,6.624) 43.081,8.296 43.093,8.299 43.093,36.978 43.093,36.979 ccw(c42.587,36.979) 42.587,37.485 13.908,37.485 13.904,37.472 cw(c12.232,35.124) 15.028,35.828 cw(c7.741,41.518) 14.989,35.778 14.994,35.767 16.03,35.767 cw(c16.03,35.124) 16.673,35.124 cw(c16.03,35.124) 16.03,34.48 14.994,34.48 14.989,34.47 cw(c7.719,28.712) 15.028,34.42 cw(c12.232,35.124) 12.933,32.327 12.928,32.321 12.928,31.326 cw(c12.232,31.326) 11.537,31.326 11.537,32.321 11.531,32.327 cw(c12.232,35.124) 9.884,33.452 9.871,33.448

## Other copper
Top Layer:
  pour cut-out: 24.183,37.485 24.14,37.442 24.14,27.45 39.5,27.45 39.5,37.485
Bottom Layer:
  pour cut-out: 24.183,37.485 24.14,37.442 24.14,27.45 39.5,27.45 39.5,37.485

## Silkscreen, mask and mechanical layers (free items; w line width, h text height)
Top Overlay:
  drawing of 27 lines, arcs and shapes, not listed
  text "IUT-E202-WF" at 26.075,32.608 h1.2
Mechanical 1:
  lines w0.508: 9.871,4.769 ccw(c10.377,4.769) 10.377,4.263 ; 9.871,4.769 ccw(c9.878,4.769) 9.871,4.769 ; 9.871,4.769 9.871,33.448 cw(c9.878,33.448) 9.884,33.452 ; 9.884,33.452 ccw(c12.232,35.124) 11.531,32.327 ; 9.884,33.452 ccw(c12.232,35.124) 9.884,33.452 ; 9.884,33.452 9.884,33.452 ; 10.377,4.263 ccw(c10.377,4.769) 10.378,4.263 ; 10.378,4.263 10.378,4.263 ; 10.378,4.263 39.055,4.263 39.056,4.262 ; 11.531,32.327 cw(c11.53,32.321) 11.537,32.321 11.537,31.326 ccw(c12.232,31.326) 12.928,31.326 12.928,32.321 cw(c12.935,32.321) 12.933,32.327 ; 11.531,32.327 11.531,32.327 ; 12.933,32.327 ccw(c12.232,35.124) 15.028,34.42 ccw(c7.719,28.712) 14.989,34.47 ; 12.933,32.327 cw(c12.232,35.124) 12.933,32.327 12.933,32.327 ; 13.904,37.472 cw(c13.908,37.478) 13.908,37.485 42.587,37.485 ; 13.904,37.472 cw(c12.232,35.124) 15.028,35.828 cw(c7.741,41.518) 14.989,35.778 ccw(c14.994,35.774) 14.987,35.774 ccw(c14.994,35.774) 14.994,35.767 16.03,35.767 ; 13.904,37.472 13.904,37.472 ; 14.989,34.47 cw(c14.994,34.474) 14.994,34.48 16.03,34.48 ccw(c16.03,35.124) 16.673,35.124 ccw(c16.03,35.124) 16.03,35.767 ; 14.989,34.47 14.989,34.47 ; 16.03,35.767 ccw(c16.03,35.774) 16.03,35.767 ; 16.03,35.767 ccw(c16.03,35.124) 16.03,35.767 ; 16.03,35.767 16.03,35.767 ; 36.935,5.928 ccw(c36.935,5.921) 36.934,5.928 ; 36.934,5.928 cw(c36.935,6.624) 36.935,7.319 37.929,7.319 ccw(c37.929,7.326) 37.936,7.325 ; 36.935,5.928 37.929,5.928 cw(c37.929,5.921) 37.936,5.923 ; 37.936,5.923 ccw(c40.732,6.624) 39.06,4.275 ; 37.936,5.923 ccw(c40.732,6.624) 37.936,5.923 ; 37.936,5.923 37.936,5.923 ; 37.936,7.325 cw(c40.732,6.624) 40.031,9.42 ; 37.936,7.325 37.936,7.325 ; 39.056,4.262 ccw(c39.06,4.268) 39.056,4.262 ; 39.056,4.262 39.057,4.261 ; 39.057,4.261 ccw(c39.061,4.267) 39.057,4.261 ; 39.057,4.261 39.06,4.259 ccw(c39.064,4.265) 39.071,4.265 ccw(c39.064,4.265) 39.068,4.27 39.065,4.272 ; 39.06,4.275 ccw(c39.057,4.27) 39.06,4.275 ; 39.06,4.275 ccw(c39.057,4.27) 39.06,4.275 ; 39.06,4.275 ccw(c40.732,6.624) 39.061,4.275 ; 39.06,4.275 39.063,4.273 cw(c39.06,4.268) 39.063,4.273 39.065,4.272 ; 39.06,4.275 39.06,4.275 ; 39.06,4.275 39.061,4.275 ; 39.06,4.275 39.06,4.275 ; 39.065,4.272 39.065,4.272 ; 40.032,9.42 ccw(c40.732,6.624) 40.031,9.42 ; 40.031,9.42 ccw(c40.03,9.427) 40.037,9.427 40.037,10.421 ; 40.031,9.42 40.032,9.42 ; 40.037,10.421 ccw(c40.03,10.421) 40.037,10.422 ; 40.037,10.422 ccw(c40.732,10.421) 40.037,10.421 ; 40.037,10.422 cw(c40.732,10.421) 41.428,10.421 41.428,9.427 ccw(c41.435,9.427) 41.433,9.42 ; 40.037,10.421 40.037,10.422 ; 41.433,9.42 cw(c40.732,6.624) 43.081,8.296 ; 41.433,9.42 41.433,9.42 ; 42.587,37.485 cw(c42.587,36.979) 43.093,36.979 ; 42.587,37.485 ccw(c42.587,36.979) 42.587,37.485 ; 42.587,37.485 ccw(c42.587,37.478) 42.587,37.485 ; 42.587,37.485 42.587,37.485 ; 42.587,37.485 42.587,37.485 ; 43.081,8.296 ccw(c40.732,6.624) 43.081,8.296 ; 43.081,8.296 ccw(c43.086,8.299) 43.093,8.299 43.093,36.978 ; 43.081,8.296 43.081,8.296 ; 43.093,36.978 ccw(c43.086,36.978) 43.093,36.979 ; 43.093,36.979 ccw(c42.587,36.979) 43.093,36.979 ; 43.093,36.978 ccw(c42.587,36.979) 43.093,36.979 ; 43.093,36.978 43.093,36.979
Mechanical 4:
  drawing of 610 lines, arcs and shapes, not listed